# EAGLE board kryon-ver2.1-final (EAGLE 9.4.2), part 1 of 2
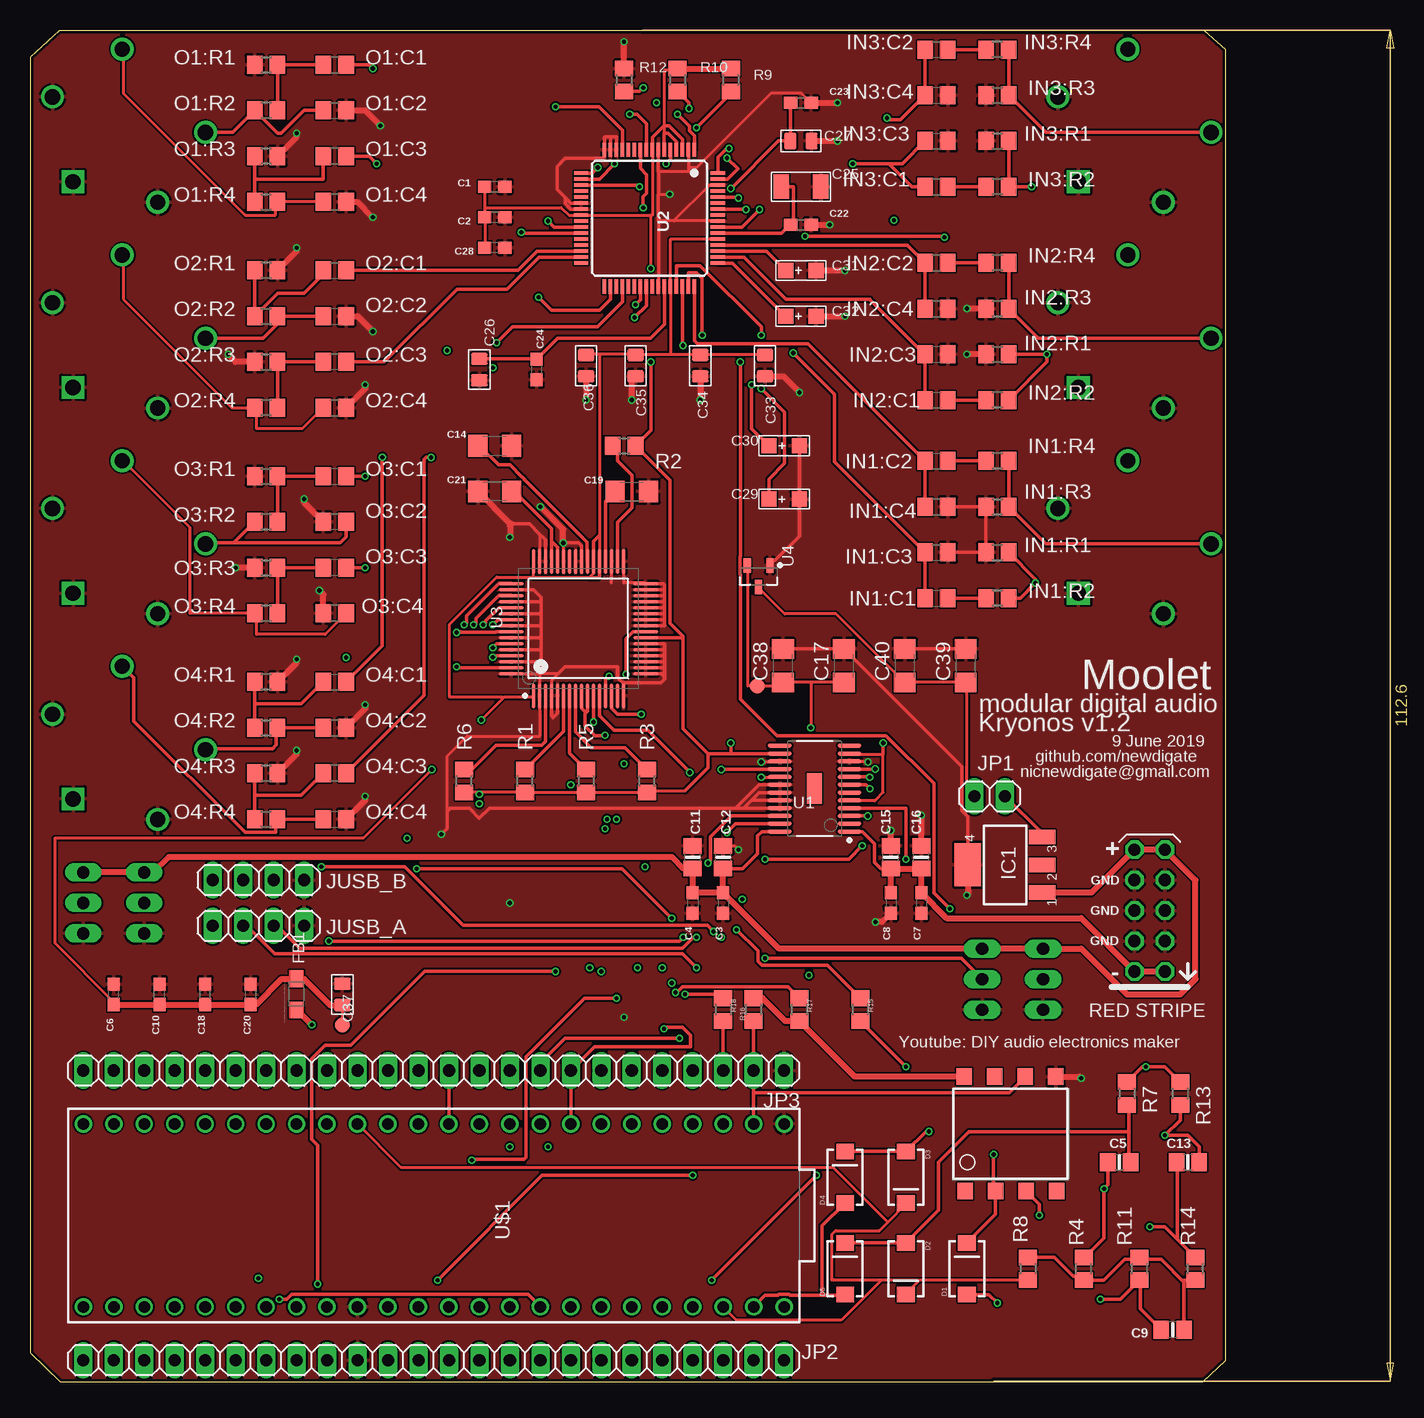
[diagram p0: board, top side]
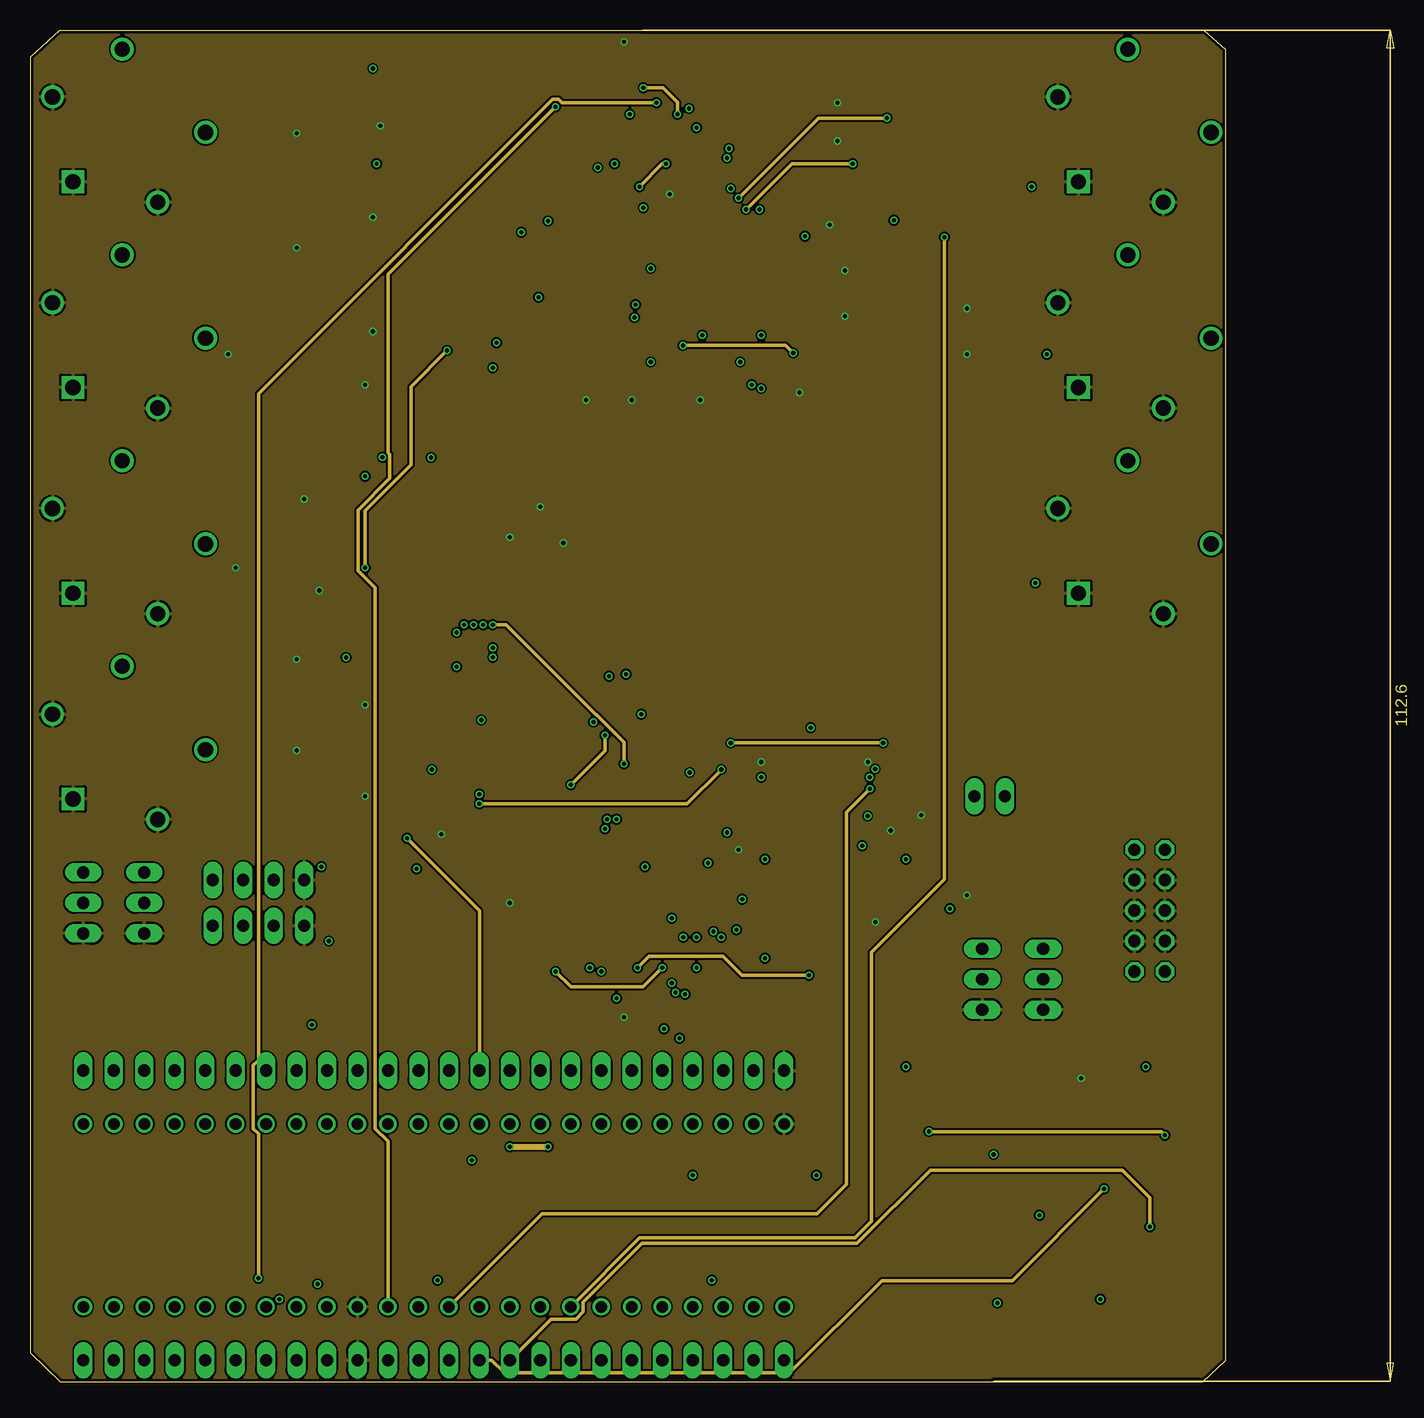
[diagram p1: board, inner layer Route2]
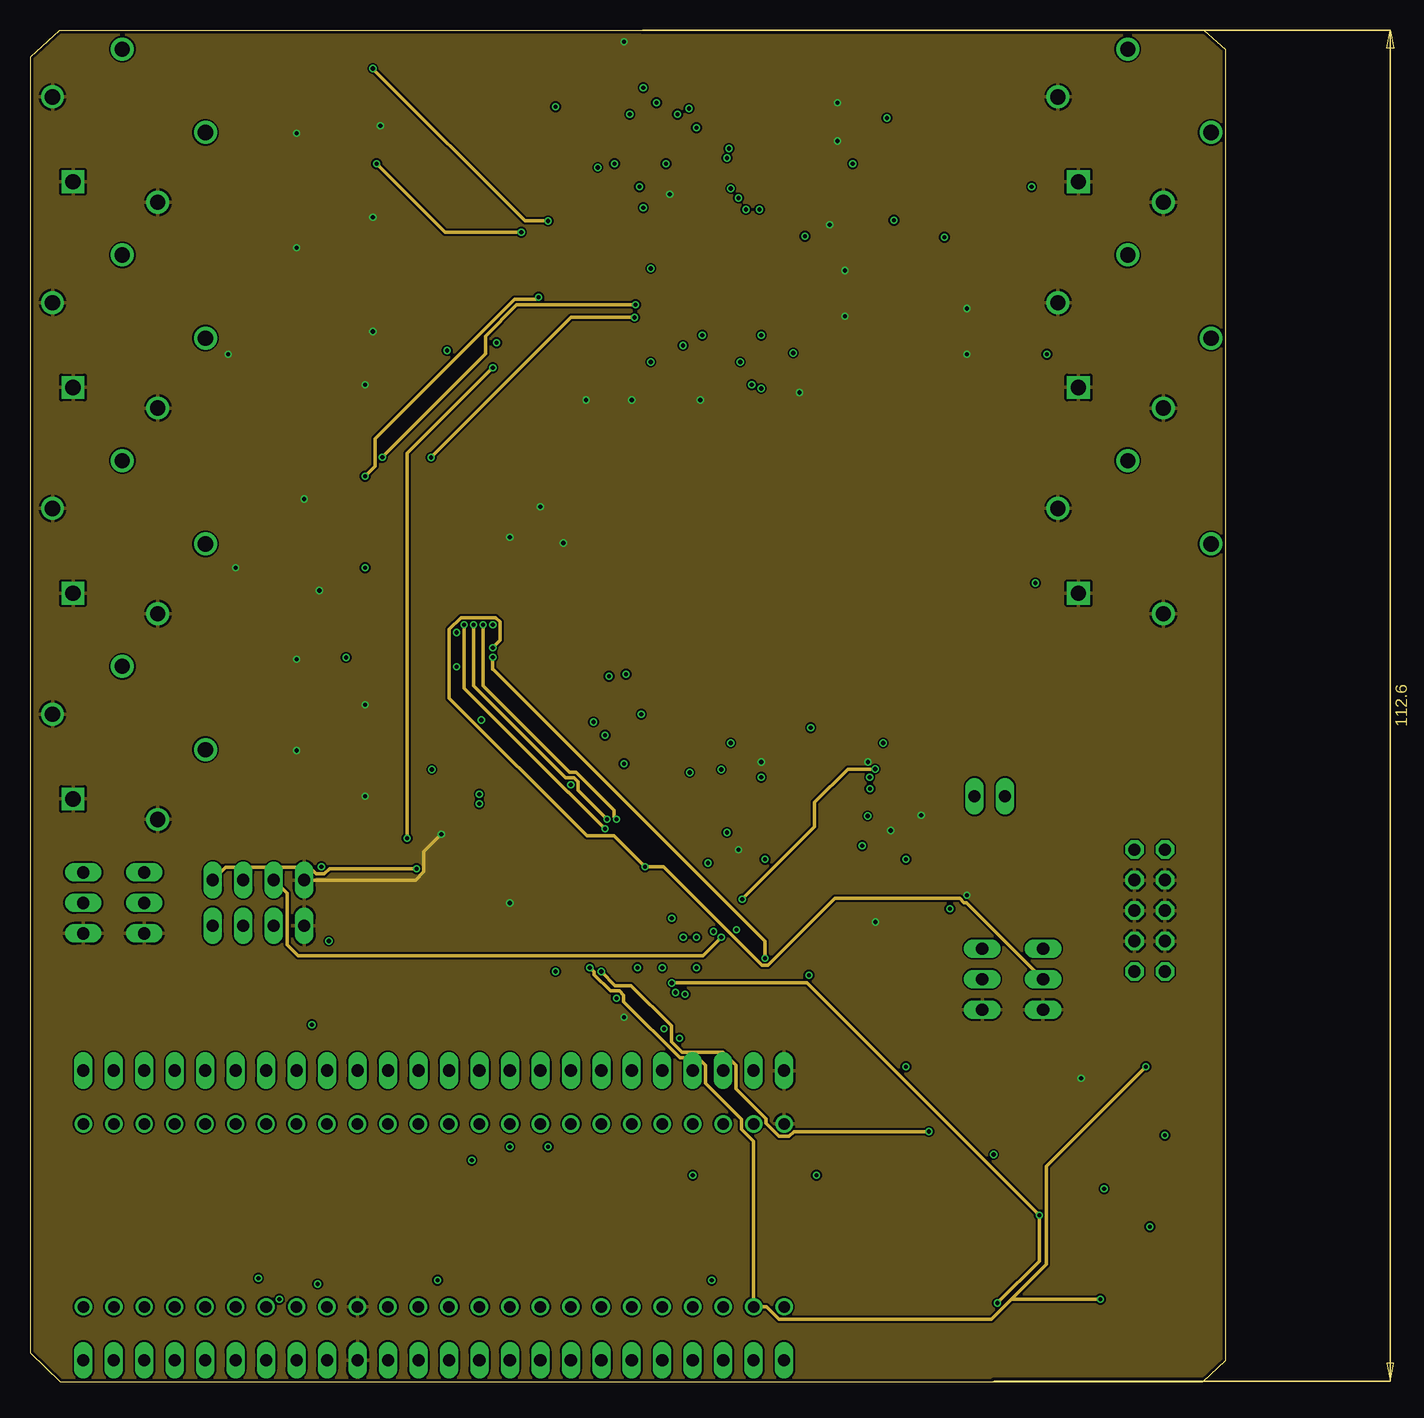
[diagram p2: board, inner layer Route3]
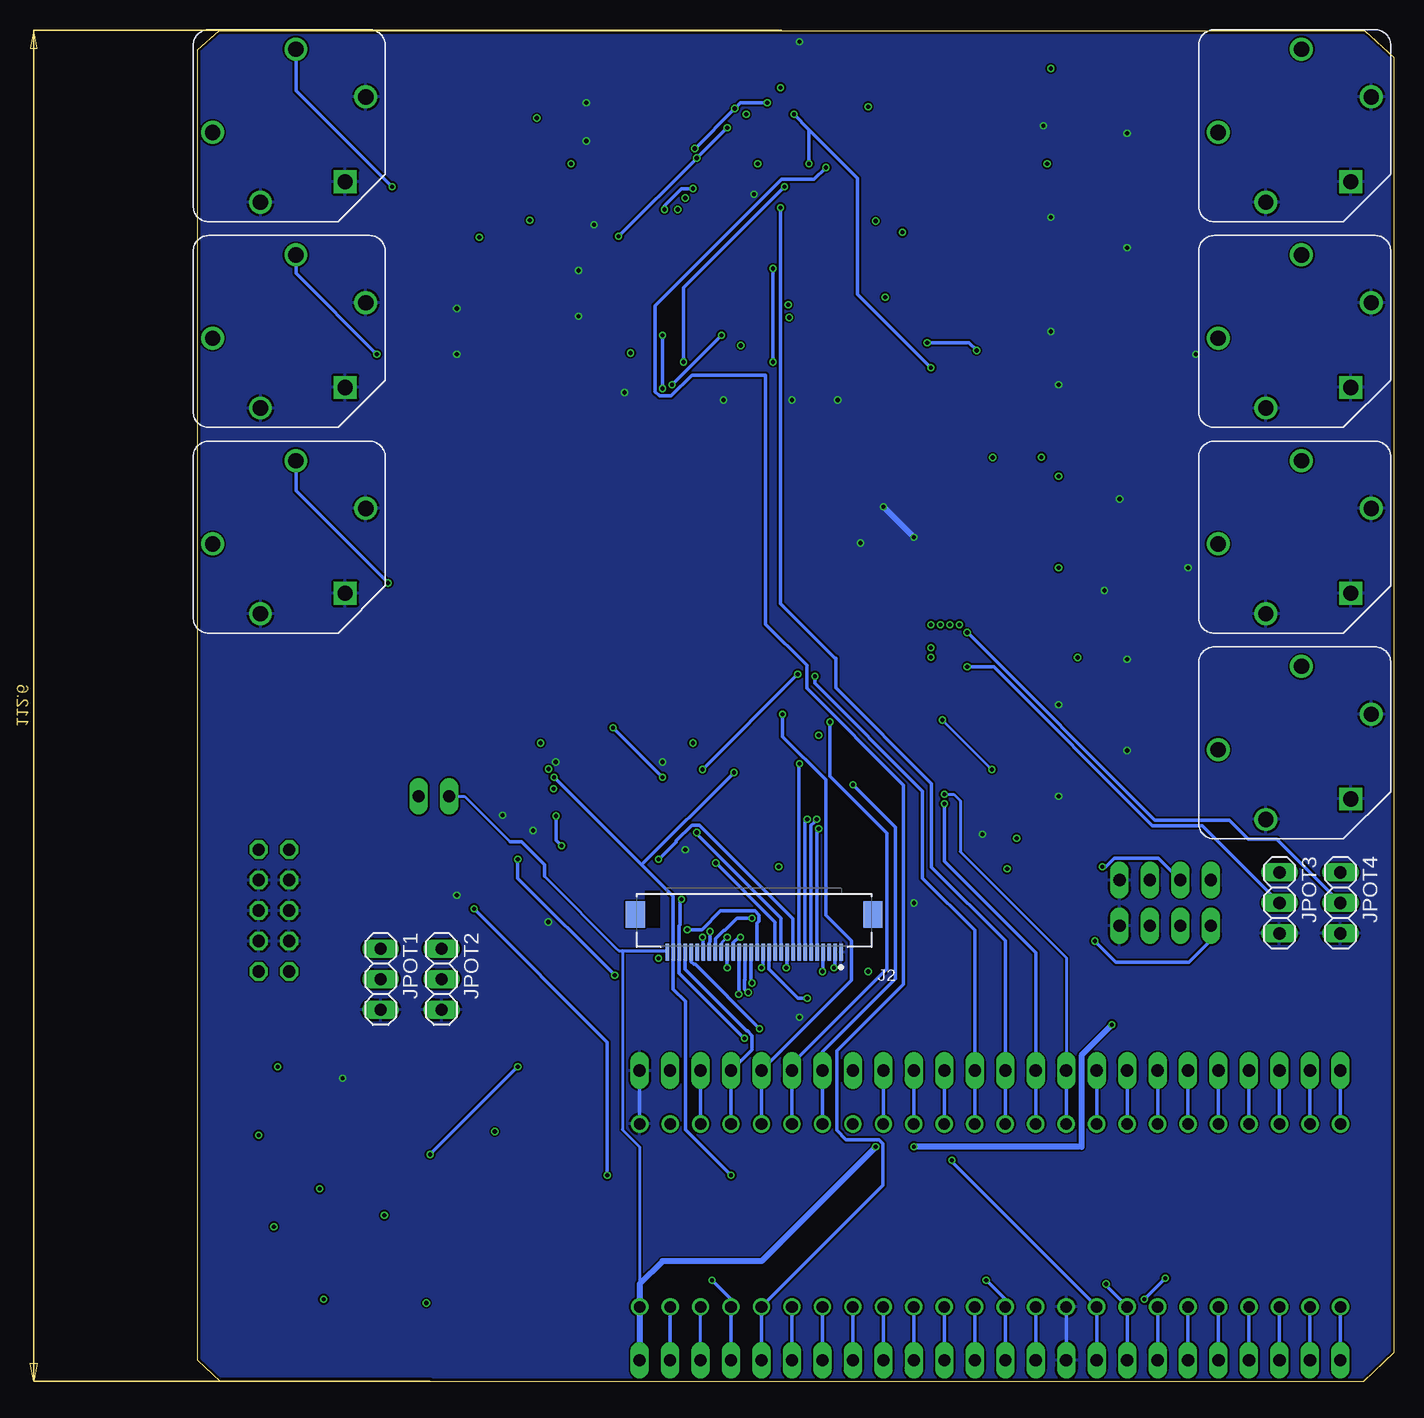
[diagram p3: board, bottom side, seen from below]

Size 99.69 x 112.6 mm. Coordinates in mm from the lower left corner, seen from the top.
Outline: 2.54,0 97.79,0 99.69,1.81 99.69,111.03 97.9,112.6 2.43,112.6 0,110.39 0,2.45 2.54,0
Copper layers (1+2*3+16): Top 0.018mm / dielectric 0.36mm / Route2 0.035mm / dielectric 0.71mm / Route3 0.035mm / dielectric 0.36mm / Bottom 0.018mm
Design rules "eC_4Layer_PClass6_BaseCopperO18-I35_eCDefault": minimum track width 0.15mm, minimum drill 0.35mm, track to track 0.15mm, track to pad 0.15mm, pad to pad 0.15mm, via to via 0.15mm, smd to smd 0mil, copper to edge 0.25mm, drill to drill 0.35mm, minimum pad ring 0.175mm, minimum via ring 0.125mm, stop-mask expansion 0mil, vias tented up to drill 0.45mm, thermal gap 0.2mm
Net classes: 0 POWERzzz: width 0.254 mm

## Footprints (pad centres in the part's own frame; a part is rotated, then mirrored left to right if it is on the bottom)
0603 = smd 1.1 x 1: 1 -0.85,0; 2 0.85,0
0805-NO = smd 1.3 x 1.5: 1 -0.95,0; 2 0.95,0
1206 = smd 1.6 x 1.8: 1 -1.4,0; 2 1.4,0
C1206 = smd 1.6 x 1.8: 1 -1.4,0; 2 1.4,0
C1206' = smd 1.27 x 2.032: 1 -1.651,0; 2 1.651,0
C0805 = smd 1.397 x 1.016: 1 0,0.889; 2 0,-0.889
AVX-A = smd 1.27 x 1.27: + -1.27,0; - 1.27,0
SMA-DIODE = smd 1.27 x 1.47: A -2.15,0; C 2.15,0
MURATA_BLM21PG221SN1D_1 = smd 1.4 x 1: 1 -1.3,0; 2 1.3,0
SOT223 = smd 1.219 x 2.235: 1 -2.311,-3.099; 2 0,-3.099; 3 2.311,-3.099 | smd 3.6 x 2.2: 4 0,3.099
C0805' = smd 1.3 x 1.5: 1 -0.95,0; 2 0.95,0
R0805 = smd 1.3 x 1.5: 1 -0.95,0; 2 0.95,0
ACJS-MV5 = drill 1.27 square: P$1 4.67,-4.67 | drill 1.27: P$2 -2.4,-6.38; P$3 -6.38,-0.56; P$4 0.56,6.38; P$5 6.38,2.4
MOLEX_52892-3033_0 = smd 0.3 x 1.4: 1 -7.25,1.575; 2 -6.75,1.575; 3 -6.25,1.575; 4 -5.75,1.575; 5 -5.25,1.575; 6 -4.75,1.575; 7 -4.25,1.575; 8 -3.75,1.575; 9 -3.25,1.575; 10 -2.75,1.575; 11 -2.25,1.575; 12 -1.75,1.575; 13 -1.25,1.575; 14 -0.75,1.575; 15 -0.25,1.575; 16 0.25,1.575; 17 0.75,1.575; 18 1.25,1.575; 19 1.75,1.575; 20 2.25,1.575; 21 2.75,1.575; 22 3.25,1.575; 23 3.75,1.575; 24 4.25,1.575; 25 4.75,1.575; 26 5.25,1.575; 27 5.75,1.575; 28 6.25,1.575; 29 6.75,1.575; 30 7.25,1.575 | smd 1.6 x 2.2: MP1 -9.9,-1.575; MP2 9.9,-1.575
1X02 = drill 1.016 long: 1 -1.27,0; 2 1.27,0
1X24 = drill 1.016 long: 1 -29.21,0; 2 -26.67,0; 3 -24.13,0; 4 -21.59,0; 5 -19.05,0; 6 -16.51,0; 7 -13.97,0; 8 -11.43,0; 9 -8.89,0; 10 -6.35,0; 11 -3.81,0; 12 -1.27,0; 13 1.27,0; 14 3.81,0; 15 6.35,0; 16 8.89,0; 17 11.43,0; 18 13.97,0; 19 16.51,0; 20 19.05,0; 21 21.59,0; 22 24.13,0; 23 26.67,0; 24 29.21,0
1X03 = drill 1.016 long: 1 -2.54,0; 2 0,0; 3 2.54,0
1X04 = drill 1.016 long: 1 -3.81,0; 2 -1.27,0; 3 1.27,0; 4 3.81,0
EURO_POWER_HEADER = drill 1.016 octagon: 1 -5.08,-1.27; 2 -5.08,1.27; 3 -2.54,-1.27; 4 -2.54,1.27; 5 0,-1.27; 6 0,1.27; 7 2.54,-1.27; 8 2.54,1.27; 9 5.08,-1.27; 10 5.08,1.27
PAD.03X.05 = smd 1.27 x 1.27: P$1 0,0
ANALOG_DEVICES_AD5754BREZ_2 = smd 2 x 0.35: 1 -2.9,3.575; 2 -2.9,2.925; 3 -2.9,2.275; 4 -2.9,1.625; 5 -2.9,0.975; 6 -2.9,0.325; 7 -2.9,-0.325; 8 -2.9,-0.975; 9 -2.9,-1.625; 10 -2.9,-2.275; 11 -2.9,-2.925; 12 -2.9,-3.575; 13 2.9,-3.575; 14 2.9,-2.925; 15 2.9,-2.275; 16 2.9,-1.625; 17 2.9,-0.975; 18 2.9,-0.325; 19 2.9,0.325; 20 2.9,0.975; 21 2.9,1.625; 22 2.9,2.275; 23 2.9,2.925; 24 2.9,3.575 | smd 1.27 x 2.54: 25 0,0
LQFP64L = smd 1.2 x 0.3: 1 -5.7,3.75; 2 -5.7,3.25; 3 -5.7,2.75; 4 -5.7,2.25; 5 -5.7,1.75; 6 -5.7,1.25; 7 -5.7,0.75; 8 -5.7,0.25; 9 -5.7,-0.25; 10 -5.7,-0.75; 11 -5.7,-1.25; 12 -5.7,-1.75; 13 -5.7,-2.25; 14 -5.7,-2.75; 15 -5.7,-3.25; 16 -5.7,-3.75; 33 5.7,-3.75; 34 5.7,-3.25; 35 5.7,-2.75; 36 5.7,-2.25; 37 5.7,-1.75; 38 5.7,-1.25; 39 5.7,-0.75; 40 5.7,-0.25; 41 5.7,0.25; 42 5.7,0.75; 43 5.7,1.25; 44 5.7,1.75; 45 5.7,2.25; 46 5.7,2.75; 47 5.7,3.25; 48 5.7,3.75 | smd 0.3 x 1.2: 17 -3.75,-5.7; 18 -3.25,-5.7; 19 -2.75,-5.7; 20 -2.25,-5.7; 21 -1.75,-5.7; 22 -1.25,-5.7; 23 -0.75,-5.7; 24 -0.25,-5.7; 25 0.25,-5.7; 26 0.75,-5.7; 27 1.25,-5.7; 28 1.75,-5.7; 29 2.25,-5.7; 30 2.75,-5.7; 31 3.25,-5.7; 32 3.75,-5.7; 49 3.75,5.7; 50 3.25,5.7; 51 2.75,5.7; 52 2.25,5.7; 53 1.75,5.7; 54 1.25,5.7; 55 0.75,5.7; 56 0.25,5.7; 57 -0.25,5.7; 58 -0.75,5.7; 59 -1.25,5.7; 60 -1.75,5.7; 61 -2.25,5.7; 62 -2.75,5.7; 63 -3.25,5.7; 64 -3.75,5.7
ANALOG_DEVICES_AD7606BSTZ_2 = smd 2.1 x 0.3: 1 -5.6,3.75; 2 -5.6,3.25; 3 -5.6,2.75; 4 -5.6,2.25; 5 -5.6,1.75; 6 -5.6,1.25; 7 -5.6,0.75; 8 -5.6,0.25; 9 -5.6,-0.25; 10 -5.6,-0.75; 11 -5.6,-1.25; 12 -5.6,-1.75; 13 -5.6,-2.25; 14 -5.6,-2.75; 15 -5.6,-3.25; 16 -5.6,-3.75; 33 5.6,-3.75; 34 5.6,-3.25; 35 5.6,-2.75; 36 5.6,-2.25; 37 5.6,-1.75; 38 5.6,-1.25; 39 5.6,-0.75; 40 5.6,-0.25; 41 5.6,0.25; 42 5.6,0.75; 43 5.6,1.25; 44 5.6,1.75; 45 5.6,2.25; 46 5.6,2.75; 47 5.6,3.25; 48 5.6,3.75 | smd 0.3 x 2.1: 17 -3.75,-5.6; 18 -3.25,-5.6; 19 -2.75,-5.6; 20 -2.25,-5.6; 21 -1.75,-5.6; 22 -1.25,-5.6; 23 -0.75,-5.6; 24 -0.25,-5.6; 25 0.25,-5.6; 26 0.75,-5.6; 27 1.25,-5.6; 28 1.75,-5.6; 29 2.25,-5.6; 30 2.75,-5.6; 31 3.25,-5.6; 32 3.75,-5.6; 49 3.75,5.6; 50 3.25,5.6; 51 2.75,5.6; 52 2.25,5.6; 53 1.75,5.6; 54 1.25,5.6; 55 0.75,5.6; 56 0.25,5.6; 57 -0.25,5.6; 58 -0.75,5.6; 59 -1.25,5.6; 60 -1.75,5.6; 61 -2.25,5.6; 62 -2.75,5.6; 63 -3.25,5.6; 64 -3.75,5.6
MICROCHIP_MCP1700T-2502E-TT_0 = smd 1.2 x 0.6: 1 -0.9,0.95; 2 -0.9,-0.95; 3 0.9,0
TEENSY_3.6_DIL = drill 0.965: 0 -7.62,25.4; 1 -7.62,22.86; 2 -7.62,20.32; 3 -7.62,17.78; 3.3V 7.62,22.86; 3.3V3 -7.62,-7.62; 4 -7.62,15.24; 5 -7.62,12.7; 6 -7.62,10.16; 7 -7.62,7.62; 8 -7.62,5.08; 9 -7.62,2.54; 10 -7.62,0; 11 -7.62,-2.54; 12 -7.62,-5.08; 13 7.62,-5.08; 14/A0 7.62,-2.54; 15/A1 7.62,0; 16/A2 7.62,2.54; 17/A3 7.62,5.08; 18/A4 7.62,7.62; 19/A5 7.62,10.16; 20/A6 7.62,12.7; 21/A7 7.62,15.24; 22/A8 7.62,17.78; 23/A9 7.62,20.32; 24 -7.62,-10.16; 25 -7.62,-12.7; 26 -7.62,-15.24; 27 -7.62,-17.78; 28 -7.62,-20.32; 29 -7.62,-22.86; 30 -7.62,-25.4; 31/A12 -7.62,-27.94; 32/A13 -7.62,-30.48; 33/A14 7.62,-30.48; 34/A15 7.62,-27.94; 35/A16 7.62,-25.4; 36/A17 7.62,-22.86; 37/A18 7.62,-20.32; 38/A19 7.62,-17.78; 39/A20 7.62,-15.24; A21 7.62,-12.7; A22 7.62,-10.16; AGND 7.62,25.4; GND -7.62,27.94; GND1 7.62,-7.62; VIN 7.62,27.94
8-SMD = smd 1.3 x 1.4: 1 -3.96,-4.96; 2 -1.42,-4.96; 3 1.12,-4.96; 4 3.66,-4.96; 5 3.59,4.58; 6 1.05,4.58; 7 -1.49,4.58; 8 -4.03,4.58

## Placement (x,y rotation side)
C1  0.1uF  [0603]  38.73,99.6 0 top
C2  0.1uF  [0603]  38.73,97.06 0 top
C3  0.1uF  [0603]  57.79,39.91 270 top
C4  0.1uF  [0603]  55.25,39.91 270 top
C5  10uF  [0805-NO]  90.8,18.32 0 top
C6  0.1uF  [0603]  6.99,32.29 90 top
C7  0.1uF  [0603]  74.3,39.91 270 top
C8  0.1uF  [0603]  71.75,39.91 270 top
C9  10uF  [0805-NO]  95.25,4.35 180 top
C10  0.1uF  [0603]  10.79,32.29 90 top
C11  10uF  [0805-NO]  55.25,43.72 90 top
C12  10uF  [0805-NO]  57.79,43.72 90 top
C13  10uF  [0805-NO]  96.52,18.32 0 top
C14  1.0uF  [1206]  38.73,78.01 0 top
C15  10uF  [0805-NO]  71.75,43.72 90 top
C16  10uF  [0805-NO]  74.3,43.72 90 top
C17  0.1uF  [C1206]  67.85,59.68 90 top
C18  0.1uF  [0603]  14.61,32.29 90 top
C19  1.0uF  [1206]  50.16,74.2 0 top
C20  0.1uF  [0603]  18.41,32.29 90 top
C21  10uF  [1206]  38.73,74.2 180 top
C22  0.1uF  [0603]  64.27,96.42 0 top
C23  0.1uF  [0603]  64.27,106.58 0 top
C24  0.1uF  [0603]  42.23,84.36 270 top
C25  100uf  [C1206']  64.27,99.6 180 top
C26  4.7uf  [C0805]  37.47,84.36 180 top
C27  22uf  [C0805]  64.27,103.41 270 top
C28  0.1uF  [0603]  38.73,94.52 180 top
C29  4.7uf  [AVX-A]  62.87,73.56 0 top
C30  4.7uf  [AVX-A]  62.87,78.01 0 top
C31  4.7uf  [AVX-A]  64.27,92.61 0 top
C32  4.7uf  [AVX-A]  64.27,88.81 0 top
C33  10uf  [C0805]  61.28,84.68 180 top
C34  100nf  [C0805]  55.88,84.68 180 top
C35  100nf  [C0805]  50.48,84.68 180 top
C36  10nf  [C0805]  46.36,84.68 180 top
C37  10nf  [C0805]  26.04,32.29 0 top
C38  0.1uF  [C1206]  62.77,59.68 90 top
C39  0.1uF  [C1206]  78.01,59.68 90 top
C40  0.1uF  [C1206]  72.93,59.68 90 top
D1  [SMA-DIODE]  78.1,9.43 90 top
D2  [SMA-DIODE]  73.02,9.43 270 top
D3  [SMA-DIODE]  73.02,17.05 270 top
D4  [SMA-DIODE]  67.94,17.05 90 top
D5  [SMA-DIODE]  67.94,9.43 90 top
FB1  MURATA_BLM21PG221SN1DMURATA_BLM21PG221SN1D_0_1  [MURATA_BLM21PG221SN1D_1]  22.22,32.29 90 top
IC1  LM340MP-05  [SOT223]  81.28,43.09 90 top
IN1:C1  10uF  [C0805']  75.56,65.31 0 top
IN1:C2  10uF  [C0805']  75.56,76.74 0 top
IN1:C3  2700pF  [C0805']  75.56,69.12 0 top
IN1:C4  2700pF  [C0805']  75.56,72.93 0 top
IN1:R1  100K  [R0805]  80.64,69.12 0 top
IN1:R2  150  [R0805]  80.64,65.31 180 top
IN1:R3  100K  [R0805]  80.64,72.93 0 top
IN1:R4  150  [R0805]  80.64,76.74 180 top
IN1:U$3  ACJS-MV-5  [ACJS-MV5]  92.07,70.39 0 bottom
IN2:C1  10uF  [C0805']  75.56,81.82 0 top
IN2:C2  10uF  [C0805']  75.56,93.25 0 top
IN2:C3  2700pF  [C0805']  75.56,85.63 0 top
IN2:C4  2700pF  [C0805']  75.56,89.44 0 top
IN2:R1  100K  [R0805]  80.64,85.63 0 top
IN2:R2  150  [R0805]  80.64,81.82 180 top
IN2:R3  100K  [R0805]  80.64,89.44 0 top
IN2:R4  150  [R0805]  80.64,93.25 180 top
IN2:U$3  ACJS-MV-5  [ACJS-MV5]  92.07,87.53 0 bottom
IN3:C1  10uF  [C0805']  75.56,99.6 0 top
IN3:C2  10uF  [C0805']  75.56,111.03 0 top
IN3:C3  2700pF  [C0805']  75.56,103.41 0 top
IN3:C4  2700pF  [C0805']  75.56,107.22 0 top
IN3:R1  100K  [R0805]  80.64,103.41 0 top
IN3:R2  150  [R0805]  80.64,99.6 180 top
IN3:R3  100K  [R0805]  80.64,107.22 0 top
IN3:R4  150  [R0805]  80.64,111.03 180 top
IN3:U$3  ACJS-MV-5  [ACJS-MV5]  92.07,104.68 0 bottom
J2  MOLEX_52892-3033MOLEX_52892-3033_0_0  [MOLEX_52892-3033_0]  53.32,37.37 180 bottom
JP1  [1X02]  80.01,48.8 180 top
JP2  [1X24]  33.66,1.81 180 top
JP3  [1X24]  33.66,25.94 180 top
JPOT1  [1X03]  84.45,33.56 270 bottom
JPOT2  [1X03]  79.38,33.56 270 bottom
JPOT3  [1X03]  9.53,39.91 270 bottom
JPOT4  [1X03]  4.45,39.91 270 bottom
JUSB_A  [1X04]  19.05,38.01 0 top
JUSB_B  [1X04]  19.05,41.81 0 top
O1:C1  4.7uF  [C0805']  25.4,109.76 0 top
O1:C2  2700pF  [C0805']  25.4,105.95 0 top
O1:C3  4.7uF  [C0805']  25.4,102.14 180 top
O1:C4  2700pF  [C0805']  25.4,98.33 0 top
O1:J_OUT  ACJS-MV-5  [ACJS-MV5]  8.26,104.68 0 bottom
O1:R1  10K  [R0805]  19.68,109.76 0 top
O1:R2  560  [R0805]  19.68,105.95 180 top
O1:R3  10K  [R0805]  19.68,102.14 180 top
O1:R4  560  [R0805]  19.68,98.33 0 top
O2:C1  4.7uF  [C0805']  25.4,92.61 0 top
O2:C2  2700pF  [C0805']  25.4,88.81 0 top
O2:C3  4.7uF  [C0805']  25.4,85 180 top
O2:C4  2700pF  [C0805']  25.4,81.19 0 top
O2:J_OUT  ACJS-MV-5  [ACJS-MV5]  8.26,87.53 0 bottom
O2:R1  10K  [R0805]  19.68,92.61 180 top
O2:R2  560  [R0805]  19.68,88.81 0 top
O2:R3  10K  [R0805]  19.68,85 0 top
O2:R4  560  [R0805]  19.68,81.19 180 top
O3:C1  4.7uF  [C0805']  25.4,75.47 0 top
O3:C2  2700pF  [C0805']  25.4,71.66 180 top
O3:C3  4.7uF  [C0805']  25.4,67.85 180 top
O3:C4  2700pF  [C0805']  25.4,64.04 180 top
O3:J_OUT  ACJS-MV-5  [ACJS-MV5]  8.26,70.39 0 bottom
O3:R1  10K  [R0805]  19.68,75.47 0 top
O3:R2  560  [R0805]  19.68,71.66 180 top
O3:R3  10K  [R0805]  19.68,67.85 0 top
O3:R4  560  [R0805]  19.68,64.04 180 top
O4:C1  4.7uF  [C0805']  25.4,58.33 0 top
O4:C2  2700pF  [C0805']  25.4,54.52 0 top
O4:C3  4.7uF  [C0805']  25.4,50.7 180 top
O4:C4  2700pF  [C0805']  25.4,46.9 0 top
O4:J_OUT  ACJS-MV-5  [ACJS-MV5]  8.26,53.24 0 bottom
O4:R1  10K  [R0805]  19.68,58.33 180 top
O4:R2  560  [R0805]  19.68,54.52 0 top
O4:R3  10K  [R0805]  19.68,50.7 180 top
O4:R4  560  [R0805]  19.68,46.9 0 top
R1  4.7k  [R0805]  41.27,50.07 90 top
R2  4.7k  [R0805]  49.53,78.01 0 top
R3  4.7k  [R0805]  51.44,50.07 90 top
R4  47k  [R0805]  87.84,9.43 90 top
R5  4.7k  [R0805]  46.36,50.07 270 top
R6  4.7k  [R0805]  36.2,50.07 90 top
R7  47k  [R0805]  91.44,24.04 270 top
R8  10k  [R0805]  83.18,9.43 270 top
R9  2K  [R0805]  58.42,108.49 270 top
R10  2K  [R0805]  53.98,108.49 270 top
R11  2.2k  [R0805]  92.5,9.43 90 top
R12  2K  [R0805]  49.53,108.49 270 top
R13  47k  [R0805]  95.88,24.04 270 top
R14  47k  [R0805]  97.15,9.43 90 top
R15  220  [R0805]  69.21,31.02 270 top
R16  220  [R0805]  60.33,31.02 90 top
R17  220  [R0805]  64.13,31.02 270 top
R18  220  [R0805]  57.79,31.02 270 top
SV1  EURO_POWER_HEADERREGULAR  [EURO_POWER_HEADER]  93.34,39.27 90 top
TP1  TEST-POINT3X5  [PAD.03X.05]  60.61,58.01 0 top
TP2  TEST-POINT3X5  [PAD.03X.05]  26.04,29.75 180 top
U1  ANALOG_DEVICES_AD5754BREZANALOG_DEVICES_AD5754BREZ_0_2  [ANALOG_DEVICES_AD5754BREZ_2]  65.41,49.44 180 top
U2  CS42448  [LQFP64L]  51.64,96.98 270 top
U3  ANALOG_DEVICES_AD7606BSTZANALOG_DEVICES_AD7606BSTZ_0_2  [ANALOG_DEVICES_AD7606BSTZ_2]  45.72,62.77 90 top
U4  MICROCHIP_MCP1700T-2502E-TTMICROCHIP_MCP1700T-2502E-TT_0_0  [MICROCHIP_MCP1700T-2502E-TT_0]  60.73,67.13 270 top
U$1  TEENSY_3.6_DIL  [TEENSY_3.6_DIL]  34.93,13.88 270 top
U$2  OPTO_DARL_6N138S  [8-SMD]  81.91,20.86 0 top

## Library data of the parts
C1-C4 C6-C8 C10 C18 C20 C22-C24 C28 = SparkFun-Capacitors; PROD_ID: CAP-08604
C5 C9 C11-C13 C15 C16 = audio amplifier example
C14 C19 = SparkFun-Capacitors; PROD_ID: CAP-09822
C17 C38-C40 IN1:R1-IN1:R4 IN2:R1-IN2:R4 IN3:R1-IN3:R4 O1:R1-O1:R4 O2:R1-O2:R4 O3:R1-O3:R4 O4:R1-O4:R4 R1-R18 = resistor-nick
C21 = SparkFun-Capacitors; PROD_ID: CAP-10057
C25 = Seeed-Capacitor; MPN: GRM31CR60J107ME39L
C26 = Seeed-Capacitor; MPN: CC0805KKX5R8BB475
C27 = Seeed-Capacitor; MPN: CC0805MKX5R5BB226
C29-C32 = Seeed-Capacitor; MPN: TAJA475*016#NJ
C33 = Seeed-Capacitor; MPN: CC0805KKX5R8BB106
C34 C35 = Seeed-Capacitor; MPN: CC0805KRX7R9BB104
C36 C37 = Seeed-Capacitor; MPN: CC0805JRX7R9BB103
D1-D5 = SparkFun
FB1 = Murata - BLM21PG221SN1D; CIIVA_IDS: 886556; COMPONENT_LINK_1_DESCRIPTION: Manufacturer URL; COMPONENT_LINK_1_URL: http://www.murata.com/; COMPONENT_LINK_3_DESCRIPTION: Package Specification; COMPONENT_LINK_3_URL: http://www.murata.com/products/catalog/pdf/c31e.pdf; DATASHEET: http://www.murata.com/products/catalog/pdf/c31e.pdf; DATASHEET_VERSION: 08/2013; DC_RESISTANCE: 0.045 Ohm Max.; FOOTPRINT_VARIANT_NAME_0: MURA-BLM21-B20-CHIP-2_V2; FOOTPRINT_VARIANT_NAME_1: MURA-BLM21-B20-CHIP-2_V1; IMPEDANCE_AT_100_MHZ: 220 Ohm +/- 25%; IMPORTED: yes; IMPORTED_FROM: vault; IMPORT_TS: 1521843617; MF: Murata; MOUNTING_TECHNOLOGY: Surface Mount; MPN: BLM21PG221SN1D; OPERATING_TEMPERATURE_RANGE: -55 to 125 degC; PACKAGE: BLM21_H1050-2; PACKAGE_DESCRIPTION: 2-Pin Chip, Body 2 x 1.25 mm; PACKING: Tape and Reel; PREFIX: FB; RATED_CURRENT: 2000 mA; RELEASE_DATE: 1390571351; VAULT_GUID: D6414E20-2109-4A17-A638-53E055BFA7B6; VAULT_REVISION: E9EAA9AD-C8DD-4E35-B9CB-2397DCCBD7BA
IC1 = linear
IN1:C1-IN1:C4 IN2:C1-IN2:C4 IN3:C1-IN3:C4 O1:C1-O1:C4 O2:C1-O2:C4 O3:C1-O3:C4 O4:C1-O4:C4 = resistor
IN1:U$3 IN2:U$3 IN3:U$3 O1:J_OUT O2:J_OUT O3:J_OUT O4:J_OUT = acjs-mv
J2 = Molex - 52892-3033; CIIVA_IDS: 12958047; CIRCUITS_LOADED: 30; COMPONENT_LINK_1_DESCRIPTION: Manufacturer URL; COMPONENT_LINK_1_URL: http://www.molex.com/molex/index.jsp; COMPONENT_LINK_3_DESCRIPTION: Package Specification; COMPONENT_LINK_3_URL: http://www.molex.com/pdm_docs/sd/528923033_sd.pdf; CONTACT_POSITION: Bottom; CURRENT_MAX_PER_CONTACT: 0.5A; DATASHEET: http://www.molex.com/webdocs/datasheets/pdf/en-us/0528923033_FFC_FPC_CONNECTORS.pdf; DURABILITY_MATING_CYCLES_MAX: 20; ENTRY_ANGLE: 90degrees Angle; FOOTPRINT_VARIANT_NAME_0: Manufacturer Recommended; IMPORTED: yes; IMPORTED_FROM: vault; IMPORT_TS: 1521848668; MATED_HEIGHT: 2.00mm; MATERIAL___METAL: Phosphor Bronze; MATERIAL___PLATING_MATING: Silver, Tin-Bismuth; MATERIAL___PLATING_TERMINATION: Silver, Tin-Bismuth; MF: Molex; MOUNTING_TECHNOLOGY: Surface Mount; MPN: 52892-3033; NUMBER_OF_ROWS: 1; ORIENTATION: Right Angle; PACKAGE: 52892-3033; PACKAGE_DESCRIPTION: 30-Lead FPC Connector, Pitch 0.5 mm; PACKAGE_VERSION: Rev. A, 05/2013; PACKING: Tape and Reel; PCB_LOCATOR: No; PCB_RETENTION: Yes; PITCH___MATING_INTERFACE: 0.50mm; PITCH___TERMINATION_INTERFACE: 0.50mm; POLARIZED_TO_PCB: No; PREFIX: J; RELEASE_DATE: 1411387070; ROHS: Yes; STACKABLE: No; VAULT_GUID: 0169C182-1258-4790-B51B-8D965E90A908; VAULT_REVISION: 36DEA303-18DB-4C92-B706-163F4C1D6A90; VOLTAGE_MAX: 50V
JP1-JP3 JPOT1-JPOT4 JUSB_A JUSB_B = pinhead
SV1 = MusicThingModular
TP1 TP2 = SparkFun-Connectors
U1 = Analog Devices - AD5754BREZ; CIIVA_IDS: 19302561; CODE__JEDEC: MO-153-ADT; COMPONENT_LINK_1_DESCRIPTION: Manufacturer URL; COMPONENT_LINK_1_URL: http://www.analog.com/en/index.html; COMPONENT_LINK_3_DESCRIPTION: Package Specification; COMPONENT_LINK_3_URL: http://www.analog.com/static/imported-files/packages/PKG_PDF/TSSOP_EP(RE)/RE_24.pdf; COMPONENT_LINK_4_DESCRIPTION: Product URL; COMPONENT_LINK_4_URL: http://www.analog.com/en/digital-to-analog-converters/da-converters/ad5754/products/product.html; COMPONENT_LINK_5_DESCRIPTION: Reference Design URL; COMPONENT_LINK_5_URL: http://www.analog.com/en/digital-to-analog-converters/da-converters/ad5754/products/product.html#prod_cross_sell; DAC_OUTPUTS: 4; DATASHEET: http://www.analog.com/static/imported-files/data_sheets/AD5724_5734_5754.pdf; DATASHEET_VERSION: Rev.D; FOOTPRINT_VARIANT_NAME_0: Level C; FOOTPRINT_VARIANT_NAME_1: Level B; FOOTPRINT_VARIANT_NAME_2: Level A; IMPORTED: yes; IMPORTED_FROM: vault; IMPORT_TS: 1521842289; MAX_V: 16.5V; MF: Analog Devices; MOUNTING_TECHNOLOGY: Surface Mount; MPN: AD5754BREZ; OP_PWR_DISS: 310mW; PACKAGE: RE-24; PACKAGE_DESCRIPTION: 24-Lead Thin Shrink Small Outline Package, Exposed Pad [TSSOP_EP]; PACKAGE_VERSION: 050806-A; PACKING: Tube; PIN_0_0_7_INSIDE_EDGE: clock; PREFIX: U; RELEASE_DATE: 1387058848; RESOLUTION_BITS: 16; ROHS: Yes; SETTLING_TIME: 8Âμs; SINGLE_SUPPLY: Yes; VAULT_GUID: 5B766953-034E-4E57-B804-7E383D3B0B35; VAULT_REVISION: FC4D4F7F-8E93-415A-939F-54CF7C990136
U2 = cirrus
U3 = Analog Devices - AD7606BSTZ; CHANNELS: 8; CIIVA_IDS: 19303426; CODE__JEDEC: MS-026-BCD; COMPONENT_LINK_1_DESCRIPTION: Manufacturer URL; COMPONENT_LINK_1_URL: http://www.analog.com/en/index.html; COMPONENT_LINK_3_DESCRIPTION: Package Specification; COMPONENT_LINK_3_URL: http://www.analog.com/static/imported-files/packages/PKG_PDF/LQFP%28ST%29/ST_64_2.pdf; COMPONENT_LINK_4_DESCRIPTION: Product URL; COMPONENT_LINK_4_URL: http://www.analog.com/en/analog-to-digital-converters/ad-converters/ad7606/products/product.html; DATASHEET: http://www.analog.com/static/imported-files/data_sheets/AD7606_7606-6_7606-4.pdf; DATASHEET_VERSION: Rev.C; FOOTPRINT_VARIANT_NAME_0: Level C; FOOTPRINT_VARIANT_NAME_1: Level B; FOOTPRINT_VARIANT_NAME_2: Level A; IMPORTED: yes; IMPORTED_FROM: vault; IMPORT_TS: 1521847520; INTERFACE: Par, Ser, SPI; MF: Analog Devices; MOUNTING_TECHNOLOGY: Surface Mount; MPN: AD7606BSTZ; PACKAGE: ST-64-2; PACKAGE_DESCRIPTION: 64-Lead Low Profile Quad Flat Package [LQFP]; PACKAGE_VERSION: 051706-A; PACKING: Tray; PIN_0_0_9_INSIDE_EDGE: clock; PREFIX: U; RELEASE_DATE: 1387012976; RESOLUTION_BITS: 16; ROHS: Yes; THROUGHPUT_RATE_SPS: 200K; VAULT_GUID: 792B8E4F-61D1-4D38-92EB-9FD13DE1F96B; VAULT_REVISION: C442BB2E-3E40-4D7F-A525-025A8B417323
U4 = TT; CIIVA_IDS: 3800373; CODE__IPC: SOT23-3; DATASHEET_VERSION: revB, Feb-2007; FOOTPRINT_VARIANT_NAME_0: Level C; FOOTPRINT_VARIANT_NAME_1: Level B; FOOTPRINT_VARIANT_NAME_2: Level A; IMPORTED: yes; IMPORTED_FROM: vault; IMPORT_TS: 1521849832; MF: Microchip; MPN: MCP1700T-2502E/TT; PACKAGE: SOT-23-TT3; PACKAGE_DESCRIPTION: 3-Lead Plastic Small Outline Transistor (TT) [SOT-23]; PACKAGE_VERSION: revBB, Aug-2009; PREFIX: U; RELEASE_DATE: 1300337871; VAULT_GUID: A4599790-6AB0-4BBA-B902-DD84360F56C4; VAULT_REVISION: 371DBAF1-D7B5-40D9-9DCF-4BEC08F5E525
U$1 = Teensy_3_and_LC_Series_Boards_v1.4
U$2 = MySparkFun

## Nets
3V3: C1.1 C2.1 C28.2 D2.C D3.C JP2.3 JP3.15 R1.1 R2.2 R3.1 R5.2 R6.1 R8.2 R9.1 R10.1 U1.5 U1.11 U1.14 U2.3 U2.4 U2.6 U2.8 U2.24 U3.23 U$1.3.3V U$1.3.3V3
56 [defaultyyyy]: D1.C R15.2 U$2.2
AD_BUSY [defaultyyyy]: JP3.5 U3.14 U$1.3
AD_BYTE_SELECT [defaultyyyy]: R1.2 U3.6
AD_CONVST [defaultyyyy]: JP3.7 U3.9 U3.10 U$1.5
AD_CS [defaultyyyy]: JP3.12 U3.13 U$1.10
AD_OS0 [defaultyyyy]: R6.2 U3.3
AD_RANGE [defaultyyyy]: R3.2 U3.8
AD_REFCAP_A [defaultyyyy]: C21.1 U3.44 U3.45
AD_REFINOUT [defaultyyyy]: U3.42
AD_REFSEL [defaultyyyy]: R2.1 U3.34
AD_REGCAP1 [defaultyyyy]: C19.1 U3.36
AD_REGCAP2 [defaultyyyy]: C14.1 U3.39
AD_RESET [defaultyyyy]: JP3.6 U3.11 U$1.4
AD_STBY [defaultyyyy]: R5.1 U3.7
AD_V1 [defaultyyyy]: J2.5 U3.49
AD_V2 [defaultyyyy]: J2.6 U3.51
AD_V3 [defaultyyyy]: J2.7 U3.53
AD_V4 [defaultyyyy]: J2.8 U3.55
AD_V5 [defaultyyyy]: JPOT4.2 U3.57
AD_V6 [defaultyyyy]: JPOT1.2 U3.59
AD_V7 [defaultyyyy]: JPOT2.2 U3.61
AD_V8 [defaultyyyy]: JPOT3.2 U3.63
ADC_DATA [defaultyyyy]: JP2.14 U2.13 U$1.13
AVDD: C3.1 C4.1 C11.1 C12.1 IC1.1 JPOT1.1 JPOT2.1 JPOT3.1 JPOT4.1 SV1.9 SV1.10 U1.24
AVIN: C6.1 C10.1 C18.1 C20.1 C33.2 C34.2 C35.2 C36.2 C37.2 FB1.2 TP2.P$1 U2.44 U2.53 U3.1 U3.37 U3.38 U3.48
AVSS: C7.1 C8.1 C15.1 C16.1 SV1.1 SV1.2 U1.1
BCLK [defaultyyyy]: JP3.11 U2.9 U2.18 U$1.9
DA_SYNC [defaultyyyy]: JP2.12 U1.7 U$1.15/A1
DA_V1 [defaultyyyy]: J2.9 U1.3
DA_V2 [defaultyyyy]: J2.10 U1.4
DA_V3 [defaultyyyy]: J2.11 U1.23
DA_V4 [defaultyyyy]: J2.12 U1.22
DA_V5 [defaultyyyy]: J2.13 JP2.16 U$1.A22
DA_V6 [defaultyyyy]: J2.14 JP2.17 U$1.A21
DAC_DATA [defaultyyyy]: JP2.5 U2.17 U$1.22/A8
GND: C1.2 C2.2 C3.2 C4.2 C6.2 C7.2 C8.2 C10.2 C11.2 C12.2 C14.2 C15.2 C16.2 C17.2 C18.2 C19.2 C20.2 C21.2 C22.2 C23.2 C24.2 C25.1 C26.1 C27.1 C28.1 C29.- C30.- C31.- C32.- C33.1 C34.1 C35.1 C36.1 C37.1 C38.2 C39.2 C40.2 IC1.4 IN1:C3.2 IN1:C4.2 IN1:R1.1 IN1:R3.1 IN1:U$3.P$1 IN1:U$3.P$2 IN1:U$3.P$5 IN2:C3.2 IN2:C4.2 IN2:R1.1 IN2:R3.1 IN2:U$3.P$1 IN2:U$3.P$2 IN2:U$3.P$5 IN3:C3.2 IN3:C4.2 IN3:R1.1 IN3:R3.1 IN3:U$3.P$1 IN3:U$3.P$2 IN3:U$3.P$5 J2.1 JP2.15 JP3.1 JPOT1.3 JPOT2.3 JPOT3.3 JPOT4.3 JUSB_A.4 JUSB_B.4 O1:C2.2 O1:C4.2 O1:J_OUT.P$1 O1:J_OUT.P$2 O1:J_OUT.P$5 O1:R1.1 O1:R3.1 O2:C2.2 O2:C4.2 O2:J_OUT.P$1 O2:J_OUT.P$2 O2:J_OUT.P$5 O2:R1.1 O2:R3.1 O3:C2.2 O3:C4.2 O3:J_OUT.P$1 O3:J_OUT.P$2 O3:J_OUT.P$5 O3:R1.1 O3:R3.1 O4:C2.2 O4:C4.2 O4:J_OUT.P$1 O4:J_OUT.P$2 O4:J_OUT.P$5 O4:R1.1 O4:R3.1 R12.1 SV1.3 SV1.4 SV1.5 SV1.6 SV1.7 SV1.8 U1.10 U1.15 U1.18 U1.19 U1.20 U1.21 U2.2 U2.7 U2.14 U2.15 U2.16 U2.22 U2.23 U2.42 U2.56 U2.62 U3.2 U3.4 U3.5 U3.16 U3.17 U3.18 U3.19 U3.20 U3.21 U3.22 U3.25 U3.26 U3.27 U3.28 U3.29 U3.30 U3.31 U3.32 U3.33 U3.35 U3.40 U3.41 U3.43 U3.46 U3.47 U3.50 U3.52 U3.54 U3.56 U3.58 U3.60 U3.62 U3.64 U4.1 U$1.GND U$1.GND1 U$2.5
IN1:N$1 [defaultyyyy]: IN1:R1.2 IN1:R2.1 IN1:U$3.P$4
IN1:N$7 [defaultyyyy]: IN1:C1.2 IN1:R2.2
IN1:N$10 [defaultyyyy]: IN1:R3.2 IN1:R4.1 IN1:U$3.P$3
IN1:N$11 [defaultyyyy]: IN1:C2.2 IN1:R4.2
IN2:N$1 [defaultyyyy]: IN2:R1.2 IN2:R2.1 IN2:U$3.P$4
IN2:N$7 [defaultyyyy]: IN2:C1.2 IN2:R2.2
IN2:N$10 [defaultyyyy]: IN2:R3.2 IN2:R4.1 IN2:U$3.P$3
IN2:N$11 [defaultyyyy]: IN2:C2.2 IN2:R4.2
IN3:N$1 [defaultyyyy]: IN3:R1.2 IN3:R2.1 IN3:U$3.P$4
IN3:N$7 [defaultyyyy]: IN3:C1.2 IN3:R2.2
IN3:N$10 [defaultyyyy]: IN3:R3.2 IN3:R4.1 IN3:U$3.P$3
IN3:N$11 [defaultyyyy]: IN3:C2.2 IN3:R4.2
LRCLK [defaultyyyy]: JP2.4 U2.5 U2.19 U$1.23/A9
MCLK [defaultyyyy]: JP3.13 U2.10 U$1.11
MIDI_IN_PIN4 [defaultyyyy]: D1.A J2.16 U$2.3
MIDI_IN_PIN5 [defaultyyyy]: J2.15 R15.1
MIDI_OUT_PIN4 [defaultyyyy]: J2.18 R18.1
MIDI_OUT_PIN5 [defaultyyyy]: J2.17 R17.1
N$1 [defaultyyyy]: IC1.3 JP1.1
N$3 [defaultyyyy]: JP3.10 U$1.8
N$4 [defaultyyyy]: JP2.7 U$1.20/A6
N$5 [defaultyyyy]: C22.1 C25.2 U2.54
N$6 [defaultyyyy]: C23.1 C27.2 U2.55
N$7 [defaultyyyy]: C24.1 C26.2 U2.43
N$8 [defaultyyyy]: C29.+ U2.45
N$9 [defaultyyyy]: C30.+ U2.47
N$10 [defaultyyyy]: IN1:C1.1 IN1:C3.1 U2.46
N$12 [defaultyyyy]: IN1:C2.1 IN1:C4.1 U2.48
N$13 [defaultyyyy]: IN3:C1.1 IN3:C3.1 U2.58
N$14 [defaultyyyy]: IN2:C2.1 IN2:C4.1 U2.52
N$15 [defaultyyyy]: IN2:C1.1 IN2:C3.1 U2.50
N$16 [defaultyyyy]: C31.+ U2.51
N$17 [defaultyyyy]: O1:C1.2 U2.26
N$18 [defaultyyyy]: O1:C3.1 U2.27
N$19 [defaultyyyy]: O2:C1.2 U2.30
N$20 [defaultyyyy]: C32.+ U2.49
N$21 [defaultyyyy]: O2:C3.1 U2.31
N$22 [defaultyyyy]: O3:C1.2 U2.34
N$23 [defaultyyyy]: O3:C3.1 U2.36
N$24 [defaultyyyy]: O4:C1.2 U2.39
N$25 [defaultyyyy]: O4:C3.1 U2.40
N$26 [defaultyyyy]: R12.2 U2.1
N$27 [defaultyyyy]: JP2.6 U$1.21/A7
N$28 [defaultyyyy]: JP3.16 U$1.24
N$29 [defaultyyyy]: JP3.17 U$1.25
N$30 [defaultyyyy]: IN3:C2.1 IN3:C4.1 U2.60
N$31 [defaultyyyy]: JP3.18 U$1.26
N$32 [defaultyyyy]: JP3.19 U$1.27
N$33 [defaultyyyy]: JP3.20 U$1.28
N$34 [defaultyyyy]: JP3.21 U$1.29
N$35 [defaultyyyy]: JP3.22 U$1.30
N$36 [defaultyyyy]: JP3.23 U$1.31/A12
N$37 [defaultyyyy]: JP3.24 U$1.32/A13
N$38 [defaultyyyy]: JP2.18 U$1.39/A20
N$39 [defaultyyyy]: JP2.19 U$1.38/A19
N$40 [defaultyyyy]: JP2.20 U$1.37/A18
N$41 [defaultyyyy]: JP2.22 U$1.35/A16
N$42: JP2.21 U$1.36/A17
N$43 [defaultyyyy]: JP2.23 U$1.34/A15
N$44 [defaultyyyy]: JP2.24 U$1.33/A14
O1:N$1 [defaultyyyy]: O1:C3.2 O1:R3.2 O1:R4.1
O1:N$3 [defaultyyyy]: O1:C2.1 O1:J_OUT.P$3 O1:R2.2
O1:N$4: O1:C4.1 O1:J_OUT.P$4 O1:R4.2
O1:N$17 [defaultyyyy]: O1:C1.1 O1:R1.2 O1:R2.1
O2:N$1 [defaultyyyy]: O2:C3.2 O2:R3.2 O2:R4.1
O2:N$3 [defaultyyyy]: O2:C2.1 O2:J_OUT.P$3 O2:R2.2
O2:N$4: O2:C4.1 O2:J_OUT.P$4 O2:R4.2
O2:N$17 [defaultyyyy]: O2:C1.1 O2:R1.2 O2:R2.1
O3:N$1 [defaultyyyy]: O3:C3.2 O3:R3.2 O3:R4.1
O3:N$3 [defaultyyyy]: O3:C2.1 O3:J_OUT.P$3 O3:R2.2
O3:N$4: O3:C4.1 O3:J_OUT.P$4 O3:R4.2
O3:N$17 [defaultyyyy]: O3:C1.1 O3:R1.2 O3:R2.1
O4:N$1 [defaultyyyy]: O4:C3.2 O4:R3.2 O4:R4.1
O4:N$3 [defaultyyyy]: O4:C2.1 O4:J_OUT.P$3 O4:R2.2
O4:N$4: O4:C4.1 O4:J_OUT.P$4 O4:R4.2
O4:N$17 [defaultyyyy]: O4:C1.1 O4:R1.2 O4:R2.1
RX [defaultyyyy]: JP3.2 R16.1 U$1.0 U$2.6
SCL [defaultyyyy]: JP2.8 R9.2 U2.63 U$1.19/A5
SDA [defaultyyyy]: JP2.9 R10.2 U2.64 U$1.18/A4
SPI0_MISO [defaultyyyy]: JP3.14 U1.16 U3.24 U$1.12
SPI0_MOSI [defaultyyyy]: J2.28 JP3.9 U1.9 U$1.7
SPI0_SCK [defaultyyyy]: J2.29 JP2.13 U1.8 U3.12 U$1.14/A0
T16_A2 [defaultyyyy]: C5.1 JP2.11 R4.2 U$1.16/A2
T17_A3 [defaultyyyy]: C13.1 JP2.10 R14.2 U$1.17/A3
T_ANALOG_LEFT [defaultyyyy]: C5.2 D2.A D5.C R7.2
T_ANALOG_RIGHT [defaultyyyy]: C13.2 D3.A D4.C J2.4 R13.2
TAGND [defaultyyyy]: C9.2 D4.A D5.A J2.2 JP2.2 R7.1 R11.1 R13.1 U$1.AGND
TEENSY_AD_OFFSET [defaultyyyy]: C9.1 R4.1 R8.1 R11.2 R14.1
TFT_CS [defaultyyyy]: J2.26 JP3.8 U$1.6
TFT_DC [defaultyyyy]: J2.27 JP3.4 U$1.2
TX [defaultyyyy]: JP3.3 R18.2 U$1.1
USB_A_D+ [defaultyyyy]: J2.21 JUSB_A.3
USB_A_D- [defaultyyyy]: J2.20 JUSB_A.2
USB_A_VCC [defaultyyyy]: J2.19 JUSB_A.1
USB_B_D+ [defaultyyyy]: J2.24 JUSB_B.3
USB_B_D- [defaultyyyy]: J2.23 JUSB_B.2
USB_B_VCC [defaultyyyy]: J2.22 JUSB_B.1
VCC: R16.2 R17.2 U$2.8
VIN: C39.1 C40.1 FB1.1 J2.30 JP1.2 JP2.1 U4.3 U$1.VIN
VREF: C17.1 C38.1 TP1.P$1 U1.17 U4.2